# Altium PCB COREV1.1_pcb5_0.PcbDoc (part 7 of 14)
Units mil, origin at the board's own origin, x right, y up, seen from the top; angles counter-clockwise.
Board outline 2860 x 2420 mil, 6 copper layers (Top Layer, GND, SIGNAL_1, SIGNAL_2, POWER, Bottom Layer); 110 components, 241 nets, 882 pads, 697 vias.
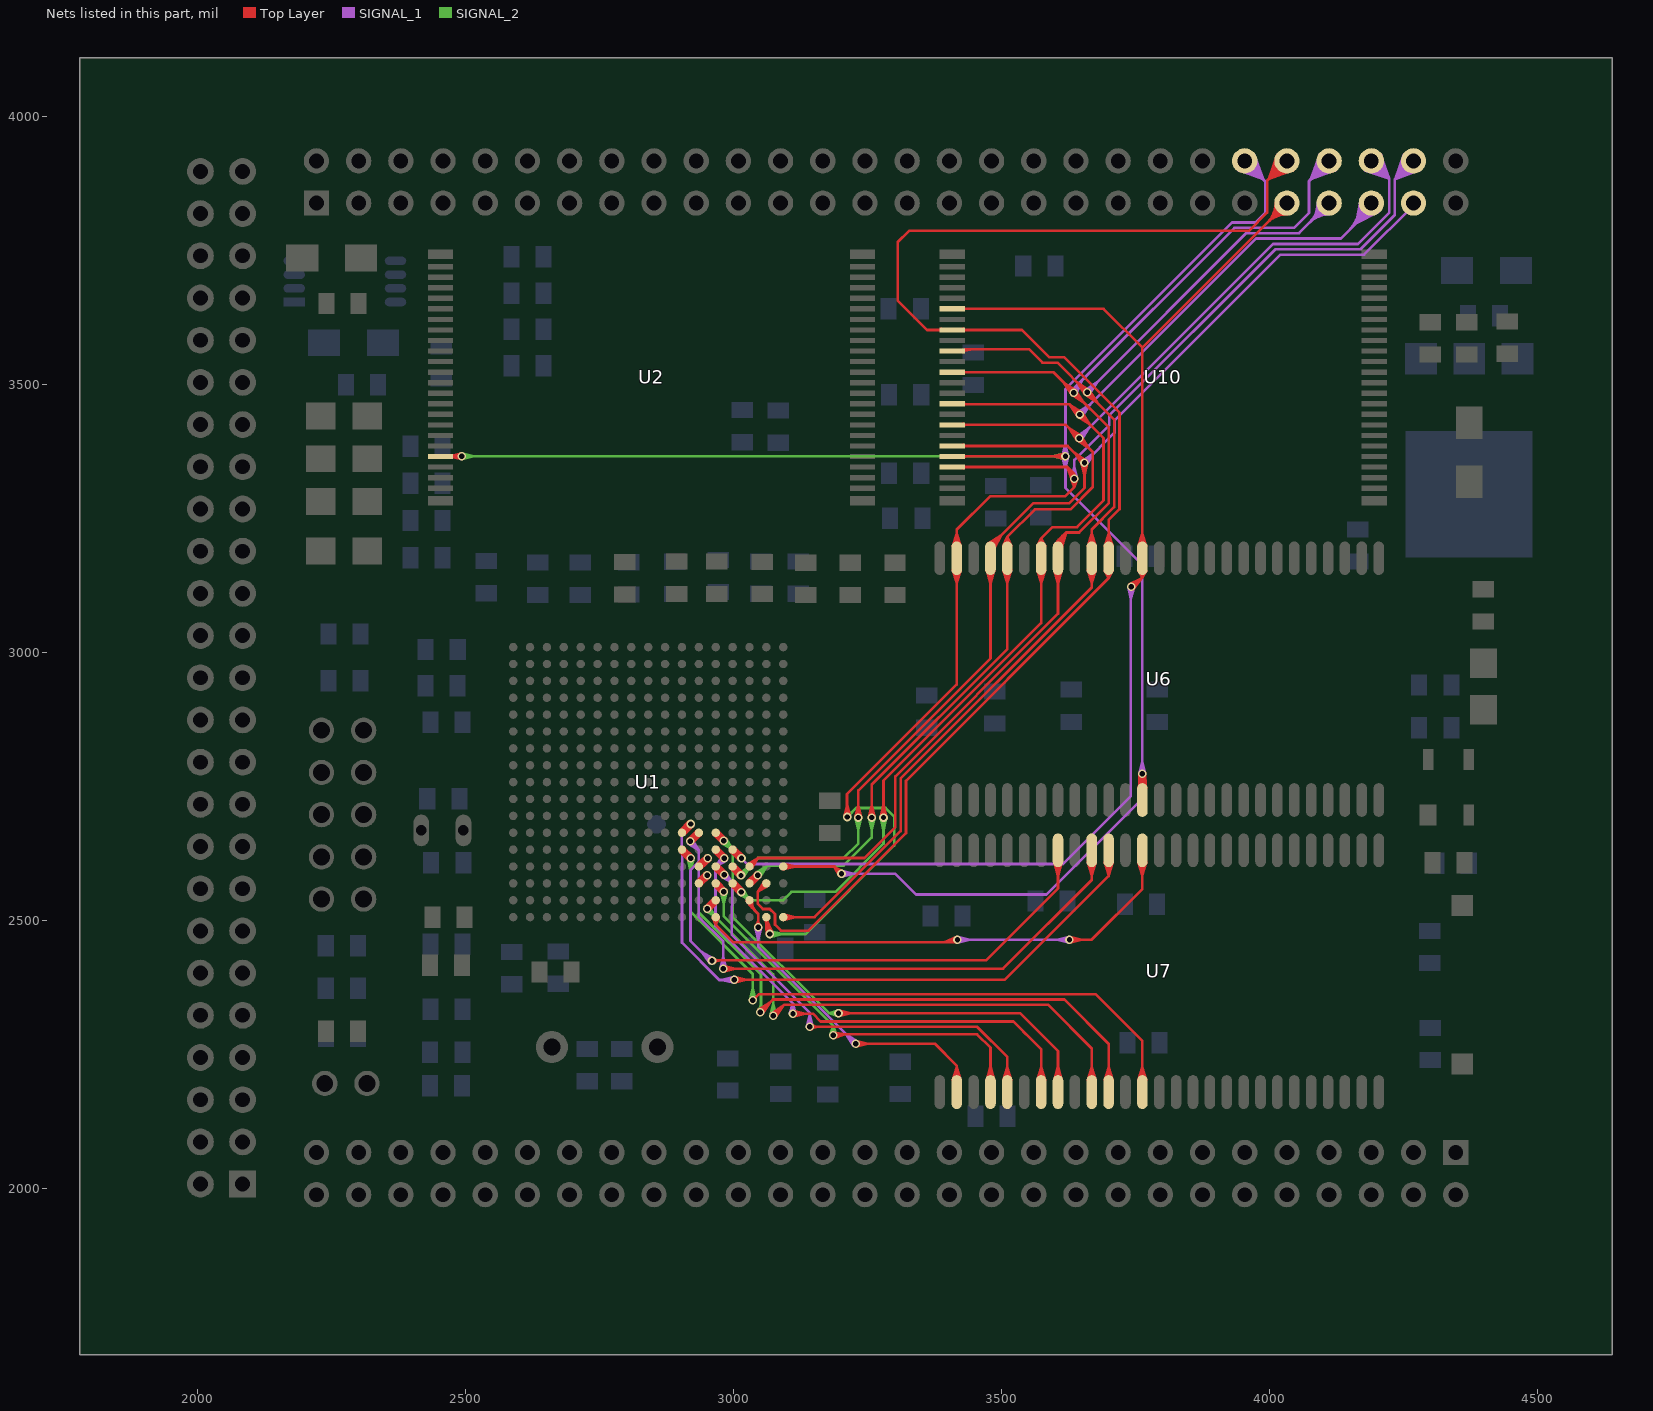
[diagram p11: the nets of this part, all layers, seen from the top]

## Via types
v1: diameter 16, hole 10, Top Layer to Bottom Layer, tented both sides, 638 vias
v2: diameter 30, hole 18, Top Layer to Bottom Layer, tented both sides, 56 vias
v3: diameter 16, hole 10, Top Layer to Bottom Layer, 2 vias
v4: diameter 30, hole 16, Top Layer to Bottom Layer, tented both sides, 1 vias

## Nets (pads, with @x,y where several pads share a name; then routed paths per layer and width w, separated by ;. In a path a pad name is that pad's centre, name@x,y a point inside that pad or via, vN(x,y) a via of type N, cw(c..) or ccw(c..) an arc to the next point about the centre after c; other vN are vias at no path point) (continued)
LDATA7: pad.PC46 U1.A14 U2.44 U6.13 U10.44 | length 5521.4
  Top Layer w5: U2.44@2453.42,3365.73 2453.7,3366 v1(2493,3366) U2.44@2472.12,3365.73 ; U2.44@2473.84,3364.02 cw(c2478.63,3359.23) 2478.63,3366 ; U2.44@2473.84,3367.44 ccw(c2477.31,3370.92) 2477.31,3366 ; v1@2489.11,3362.11 ccw(c2479.72,3352.72) 2479.72,3366 ccw(c2479.72,3379.28) v1@2489.11,3369.89 ; v1@2492.05,3366 U2.44@2472.12,3365.73 ; v1@2492.2,3371.44 U2.44@2472.12,3365.73 ; v1@2492.34,3371.46 2470,3366 2492.34,3360.54 U2.44@2472.12,3365.73 ; U1.A14@3092.85,2600.65 3188,2600.65 ; U1.A14@3093.49,2595.32 3115.73,2600.65 U1.A14@3093.49,2605.99 ; U1.A14@3096.65,2596.85 cw(c3105.83,2587.68) 3105.83,2600.65 cw(c3105.83,2613.63) U1.A14@3096.65,2604.45 ; v1@3196.15,2587 ccw(c3182.88,2587) 3192.26,2596.39 ccw(c3201.65,2605.78) v1@3201.65,2592.5 ; v1@3197.25,2583.7 3188,2600.65 ; v1@3204.95,2591.4 3188,2600.65 ; U10.44@3408.42,3365.73 3408.7,3366 v1(3619.5,3366) 3596.5,3366 ; U10.44@3427.12,3365.73 3447.05,3366 ; U10.44@3428.84,3364.02 cw(c3433.63,3359.23) 3433.63,3366 ; U10.44@3428.84,3367.44 ccw(c3432.31,3370.92) 3432.31,3366 ; v1@3615.61,3362.11 ccw(c3606.22,3352.72) 3606.22,3366 ccw(c3606.22,3379.28) v1@3615.61,3369.89 ; v1@3618.84,3360.54 3596.5,3366 ; v1@3618.84,3371.46 3596.5,3366 ; U6.13@3755.82,2747.47 v1@3763.08,2771.23 ; v1@3757.64,2774.79 U6.13@3757.04,2751.46 ; U6.13@3757.89,2751.58 ccw(c3745.35,2764.11) 3763.08,2764.11 ccw(c3780.81,2764.11) U6.13@3768.27,2751.58 ; v1@3757.97,2771.96 U6.13@3769.12,2751.46 ; v1@3759.19,2770.11 cw(c3749.8,2760.72) 3763.08,2760.72 cw(c3776.36,2760.72) v1@3766.97,2770.11 ; U6.13@3763.08,2724.73 v1(3763.08,2774) ; U6.13@3763.08,2746.39 v1@3763.08,2771.23 ; v1@3768.19,2771.96 U6.13@3757.04,2751.46 ; v1@3768.52,2774.79 U6.13@3769.12,2751.46 ; U6.13@3770.34,2747.47 v1@3763.08,2771.23 ; 3188,2600.65 v1(3201.65,2587) 3188,2600.65 ; U6.13@3757.04,2751.46 v1(3763.08,2774) ; U6.13@3763.08,2751 3768.54,2773.34 U6.13@3763.08,2751 ; U6.13@3763.08,2751 3757.62,2773.34 U6.13@3763.08,2751 ; U6.13@3763.08,2751 v1(3763.08,2774) ; v1(3763.08,2774) U6.13@3769.12,2751.46
  SIGNAL_1 w5: v1(3201.65,2587) 3302.08,2587 3340.58,2548.5 3584.14,2548.5 3763.08,2727.44 v1@3763.08,2771.35 ; v1@3202.31,2581.54 3224.65,2587 v1@3202.31,2592.46 ; v1@3205.54,2583.11 cw(c3214.93,2573.72) 3214.93,2587 cw(c3214.93,2600.28) v1@3205.54,2590.89 ; v1@3614.04,3365.34 3619.5,3343 ; v1@3614.04,3366.66 3619.5,3389 v1@3624.96,3366.66 ; v1@3615.61,3362.11 cw(c3606.22,3352.72) 3619.5,3352.72 cw(c3632.78,3352.72) v1@3623.39,3362.11 ; v1@3615.61,3369.89 ccw(c3606.22,3379.28) 3619.5,3379.28 ccw(c3632.78,3379.28) v1@3623.39,3369.89 ; v1@3624.96,3365.34 3619.5,3343 ; v1@3757.62,2773.34 3763.08,2751 ; v1@3757.62,2774.66 3763.08,2797 v1@3768.54,2774.66 ; v1@3759.19,2770.11 cw(c3749.8,2760.72) 3763.08,2760.72 cw(c3776.36,2760.72) v1@3766.97,2770.11 ; v1@3759.19,2777.89 ccw(c3749.8,2787.28) 3763.08,2787.28 ccw(c3776.36,2787.28) v1@3766.97,2777.89 ; v1@3768.54,2773.34 3763.08,2751 ; pad.PC46@3942.76,3899.61 3988.31,3883.22 ; pad.PC46@3944.74,3904.31 3988.31,3883.22 ; pad.PC46@3947.17,3908.73 3988.31,3883.22 ; pad.PC46@3950.03,3912.85 3988.31,3883.22 ; pad.PC46@3954.08,3896.33 cw(c3954.08,3845.33) 3990.14,3881.39 cw(c4026.19,3917.45) pad.PC46@3975.2,3917.45 ; pad.PC46@3954.08,3901.33 cw(c3954.08,3862.4) 3981.6,3889.93 cw(c4009.12,3917.45) pad.PC46@3970.2,3917.45 ; pad.PC46@3954.08,3906.33 cw(c3954.08,3879.48) 3973.06,3898.46 cw(c3992.05,3917.45) pad.PC46@3965.2,3917.45 ; pad.PC46@3954.08,3917.45 3993,3878.53 3993,3821 3974.5,3802.5 3930.43,3802.5 3619.5,3491.57 v1(3619.5,3366) ; pad.PC46@3958.67,3921.49 3988.31,3883.22 ; pad.PC46@3962.79,3924.36 3988.31,3883.22 ; pad.PC46@3967.22,3926.79 3988.31,3883.22 ; pad.PC46@3971.91,3928.77 3988.31,3883.22 ; 3619.5,3343 v1(3619.5,3366) ; v1(3619.5,3366) 3619.5,3307 3763.08,3163.42 v1(3763.08,2774) 3763.08,2751
  SIGNAL_2 w5: v1(2493,3366) v1(3619.5,3366) ; v1@2493.66,3360.54 2516,3366 v1@2493.66,3371.46 ; v1@2496.89,3362.11 cw(c2506.28,3352.72) 2506.28,3366 cw(c2506.28,3379.28) v1@2496.89,3369.89 ; v1@3615.61,3362.11 ccw(c3606.22,3352.72) 3606.22,3366 ccw(c3606.22,3379.28) v1@3615.61,3369.89 ; v1@3618.84,3360.54 3596.5,3366 v1@3618.84,3371.46
LDATA8: pad.PC47 U1.D13 U6.42 U10.30 | length 3380.4
  Top Layer w5: U1.D13@2998.37,2626.78 cw(c2998.37,2612.63) 3008.37,2622.63 ; U1.D13@3003.74,2632.15 ccw(c3015.55,2632.15) 3007.2,2623.8 ; v1@3009.5,2616 ccw(c2996.22,2616) 3005.61,2625.39 ccw(c3015,2634.78) v1@3015,2621.5 ; v1@3010.05,2613.61 U1.D13@3002.53,2635.55 ; v1@3010.67,2612.61 U1.D13@2998.85,2632.15 ; v1@3010.73,2612.54 U1.D13@2998.37,2632.15 ; v1@3011.64,2611.65 U1.D13@2995.09,2627.89 ; v1@3017.24,2621.02 U1.D13@2995.09,2627.89 ; v1@3018.34,2620.37 U1.D13@2998.37,2632.15 ; v1@3018.39,2620.33 U1.D13@2998.85,2632.15 ; v1@3019.25,2619.49 U1.D13@3002.53,2635.55 ; U10.30@3408.42,3641.32 3633,3641.32 ; U10.30@3427.12,3641.32 3447.05,3641.32 ; U10.30@3428.84,3639.61 cw(c3432.97,3635.47) 3432.97,3641.32 cw(c3432.97,3647.16) U10.30@3428.84,3643.03 ; 3643.1,3641.32 3633,3641.32 ; v1@3738.99,3127.1 3761.83,3138.75 ; v1@3742,3128 ccw(c3742,3149.92) 3757.5,3134.42 ; v1@3745.92,3118.64 3761.83,3138.75 ; U6.42@3755.81,3198.63 3763,3222.41 ; U6.42@3755.99,3152.37 3763.08,3140 ; U6.42@3757.89,3202.76 ccw(c3745.55,3215.1) 3763,3215.1 ; U6.42@3758.82,3148.28 cw(c3752.9,3140) 3763.08,3140 ; 3763,3215.49 ccw(c3781,3215.49) U6.42@3768.27,3202.76 ; U6.42@3763.08,3154.26 3763.08,3140 ; U6.42@3763.08,3197.57 3763,3222.41 ; U6.42@3763.5,3179.5 U6.42@3763.08,3179.92 ; U6.42@3767.34,3148.28 ccw(c3773.26,3140) 3763.08,3140 ; U6.42@3770.18,3152.37 3763.08,3140 ; U6.42@3770.34,3198.68 3763,3222.41 ; pad.PC47@4011.7,3838.71 cw(c3960.7,3838.71) 3996.76,3802.65 cw(c4032.82,3766.59) pad.PC47@4032.82,3817.59 ; pad.PC47@4016.7,3838.71 cw(c3977.77,3838.71) 4005.3,3811.19 cw(c4032.82,3783.66) pad.PC47@4032.82,3822.59 ; pad.PC47@4021.7,3838.71 cw(c3994.85,3838.71) 4013.83,3819.72 cw(c4032.82,3800.74) pad.PC47@4032.82,3827.59 ; pad.PC47@4032.82,3838.71 3763,3568.89 ; U1.D13@2995.09,2627.89 v1(3015,2616) ; U1.D13@2995.09,2627.89 v1(3015,2616) ; U1.D13@2998.37,2632.15 U1.D13@2998.85,2632.15 ; U1.D13@2998.37,2632.15 v1(3015,2616) ; U1.D13@2998.37,2632.15 v1(3015,2616) ; U1.D13@2998.85,2632.15 v1(3015,2616) ; U1.D13@2998.85,2632.15 v1(3015,2616) ; U1.D13@3002.53,2635.55 v1(3015,2616) ; U1.D13@3002.53,2635.55 v1(3015,2616) ; 3633,3641.32 3690.57,3641.32 3763,3568.89 ; 3761.83,3138.75 v1(3742,3122.5) 3745.58,3122.5 3763.08,3140 ; 3763,3568.89 3763,3180 U6.42@3763.08,3179.92 ; 3763.08,3140 U6.42@3763.08,3175.91 U6.42@3763.08,3179.92
  SIGNAL_1 w5: v1(3015,2616) 3025.5,2605.5 3615,2605.5 3741.5,2732 3741.5,3122 v1(3742,3122.5) 3741.5,3099.48 ; v1@3736.53,3121.96 3741.5,3099.48 ; v1@3738.11,3118.61 cw(c3729.93,3110.43) 3741.5,3110.43 ; 3741.5,3108.01 cw(c3756.49,3108.01) v1@3745.89,3118.61 ; v1@3747.45,3121.72 3741.5,3099.48
LDATA9: pad.PC48 U1.B15 U6.44 U10.32 | length 3713.7
  Top Layer w5: U1.B15@3055.98,2569.16 cw(c3043.01,2569.16) 3052.18,2559.98 cw(c3061.36,2550.81) U1.B15@3061.36,2563.78 ; U1.B15@3057.14,2572.48 3045.24,2553.04 ; U1.B15@3061.81,2569.16 U1.B15@3061.36,2569.16 ; U1.B15@3064.68,2564.94 3045.24,2553.04 ; 3105.77,2481 3095,2481 ; 3369.8,3601.95 U10.32@3389.72,3601.95 ; U10.32@3388.01,3600.24 ccw(c3383.88,3596.1) 3383.88,3601.95 ccw(c3383.88,3607.79) U10.32@3388.01,3603.66 ; U10.32@3427.12,3601.95 3447.05,3601.95 ; U10.32@3428.84,3600.24 cw(c3432.97,3596.1) 3432.97,3601.95 cw(c3432.97,3607.79) U10.32@3428.84,3603.66 ; U6.44@3692.83,3198.65 3700.09,3222.41 ; U6.44@3692.95,3152.54 3700.09,3138.63 ; U6.44@3694.9,3202.76 ccw(c3682.36,3215.29) 3700.09,3215.29 ccw(c3717.81,3215.29) U6.44@3705.28,3202.76 ; U6.44@3695.4,3148.61 cw(c3687.13,3138.63) 3700.09,3138.63 ; U6.44@3700.09,3154.26 3700.09,3138.63 ; U6.44@3700.09,3197.57 3700.09,3222.41 ; U6.44@3704.77,3148.61 ccw(c3713.05,3138.63) 3700.09,3138.63 ; U6.44@3707.22,3152.54 3700.09,3138.63 ; U6.44@3707.35,3198.65 3700.09,3222.41 ; pad.PC48@4011.7,3917.45 cw(c3960.7,3917.45) 3996.76,3881.39 cw(c4032.82,3845.33) pad.PC48@4032.82,3896.33 ; pad.PC48@4014.98,3928.77 3998.59,3883.22 ; pad.PC48@4016.7,3917.45 cw(c3977.77,3917.45) 4005.3,3889.93 cw(c4032.82,3862.4) pad.PC48@4032.82,3901.33 ; pad.PC48@4019.68,3926.79 3998.59,3883.22 ; pad.PC48@4021.7,3917.45 cw(c3994.85,3917.45) 4013.83,3898.46 cw(c4032.82,3879.48) pad.PC48@4032.82,3906.33 ; pad.PC48@4024.1,3924.36 3998.59,3883.22 ; pad.PC48@4028.22,3921.49 3998.59,3883.22 ; pad.PC48@4032.82,3917.45 3996,3880.63 3996,3821 3962,3787 3327.85,3787 3306.5,3765.65 3306.5,3656.5 3361.05,3601.95 U10.32@3408.42,3601.95 3538.55,3601.95 3589.68,3550.82 3617.52,3550.82 3720.5,3447.85 3720.5,3267.5 3700.09,3247.09 U6.44@3700.09,3175.91 3700.09,3138.63 ; pad.PC48@4036.86,3912.85 3998.59,3883.22 ; pad.PC48@4039.73,3908.73 3998.59,3883.22 ; pad.PC48@4042.16,3904.31 3998.59,3883.22 ; pad.PC48@4044.14,3899.61 3998.59,3883.22 ; 3045.24,2553.04 U1.B15@3061.36,2569.16 ; 3045.24,2553.04 3045.24,2531.24 3054.93,2521.54 3067.73,2521.54 3077.48,2511.78 3077.48,2492.19 3088.67,2481 3095,2481 ; 3045.24,2553.04 U1.B15@3061.36,2569.16 ; 3095,2481 3140.2,2481 3322,2662.8 3322,2760.54 3700.09,3138.63
LDATA10: pad.PC49 U1.A17 U6.45 U10.34 | length 2934.2
  Top Layer w5: U1.A17@3092.85,2506.16 3151.23,2506.16 3312,2666.94 3312,2764.69 3668.59,3121.28 U6.45@3668.59,3175.91 3668.59,3229.73 3710.5,3271.64 3710.5,3435 v1(3659.96,3485.54) ; U1.A17@3093.49,2500.83 3115.73,2506.16 U1.A17@3093.49,2511.5 ; U1.A17@3096.65,2502.36 cw(c3105.83,2493.19) 3105.83,2506.16 cw(c3105.83,2519.14) U1.A17@3096.65,2509.96 ; U10.34@3408.42,3562.58 3429.58,3562.58 3433,3566 ; U10.34@3427.94,3564.86 ccw(c3429.57,3569.43) 3433,3566 ; U10.34@3428.84,3560.87 cw(c3441.23,3548.47) 3441.23,3566 ; U10.34@3429.55,3562.56 cw(c3433,3562.55) 3433,3566 ; 3447.22,3566 U10.34@3427.12,3562.58 ; v1@3654.46,3485.54 ccw(c3641.18,3485.54) 3650.57,3494.93 ccw(c3659.96,3504.32) v1@3659.96,3491.04 ; v1@3655.69,3482.08 3641.36,3504.14 ; v1@3656.5,3481.26 3678.57,3466.93 v1@3664.24,3489 ; v1@3659.96,3480.04 cw(c3659.96,3466.76) 3669.35,3476.15 cw(c3678.74,3485.54) v1@3665.46,3485.54 ; U6.45@3661.33,3153.18 3668.59,3129.42 ; U6.45@3661.33,3198.65 3668.59,3222.41 ; U6.45@3663.4,3149.07 cw(c3650.86,3136.53) 3668.59,3136.53 cw(c3686.32,3136.53) U6.45@3673.78,3149.07 ; U6.45@3663.4,3202.76 ccw(c3650.86,3215.29) 3668.59,3215.29 ccw(c3686.32,3215.29) U6.45@3673.78,3202.76 ; v1@3663.42,3489.81 3641.36,3504.14 ; U6.45@3668.59,3154.26 3668.59,3129.42 ; U6.45@3668.59,3197.57 3668.59,3222.41 ; U6.45@3675.85,3153.18 3668.59,3129.42 ; U6.45@3675.85,3198.65 3668.59,3222.41 ; U10.34@3427.12,3562.58 3433,3566 ; U10.34@3427.12,3562.58 3433,3566 ; 3433,3566 3551.26,3566 3576.44,3540.82 3604.68,3540.82 v1(3659.96,3485.54) ; 3641.36,3504.14 v1(3659.96,3485.54)
  SIGNAL_1 w5: v1@3656.5,3489.81 3678.57,3504.14 v1@3664.24,3482.08 ; v1(3659.96,3485.54) 3956.93,3782.5 4055.35,3782.5 pad.PC49@4111.56,3838.71 ; v1@3659.96,3491.04 ccw(c3659.96,3504.32) 3669.35,3494.93 ccw(c3678.74,3485.54) v1@3665.46,3485.54 ; pad.PC49@4090.44,3838.71 cw(c4039.45,3838.71) 4075.5,3802.65 cw(c4111.56,3766.59) pad.PC49@4111.56,3817.59 ; pad.PC49@4095.44,3838.71 cw(c4056.52,3838.71) 4084.04,3811.19 cw(c4111.56,3783.66) pad.PC49@4111.56,3822.59 ; pad.PC49@4100.44,3838.71 cw(c4073.59,3838.71) 4092.57,3819.72 cw(c4111.56,3800.74) pad.PC49@4111.56,3827.59
LDATA11: pad.PC50 U1.C14 U6.47 U10.36 | length 3562
  Top Layer w5: U1.C14@3026.55,2604.88 3045.71,2616.5 ; U1.C14@3029.86,2600.65 3045.71,2616.5 ; U1.C14@3029.86,2606.03 ccw(c3029.86,2619) 3039.04,2609.83 ccw(c3048.21,2600.65) U1.C14@3035.24,2600.65 ; U1.C14@3034.09,2597.34 3045.71,2616.5 ; U10.36@3408.42,3523.21 3596.79,3523.21 v1(3635,3485) ; U10.36@3427.12,3523.21 3447.05,3523.21 ; U10.36@3428.84,3521.5 cw(c3432.97,3517.36) 3432.97,3523.21 cw(c3432.97,3529.05) U10.36@3428.84,3524.92 ; U6.47@3598.34,3153.18 3605.6,3129.42 ; U6.47@3599.69,3201.92 3620.5,3224 ; U6.47@3600.41,3149.07 cw(c3587.87,3136.53) 3605.6,3136.53 cw(c3623.32,3136.53) U6.47@3610.79,3149.07 ; U6.47@3602.49,3204.22 ccw(c3600.22,3209.1) 3605.6,3209.1 ; U6.47@3602.99,3197.07 cw(c3617.9,3199.93) 3607.16,3210.66 ; U6.47@3605.6,3154.26 3605.6,3129.42 ; U6.47@3607.9,3198.01 cw(c3629.09,3202.08) 3613.83,3217.33 ; U6.47@3608.7,3204.22 cw(c3610.98,3209.1) 3605.6,3209.1 ; U6.47@3612.38,3194.76 3620.5,3224 ; U6.47@3612.81,3198.95 cw(c3640.27,3204.22) 3620.5,3224 ; U6.47@3612.86,3153.18 3605.6,3129.42 ; v1@3629.5,3485 ccw(c3616.22,3485) 3625.61,3494.39 ccw(c3635,3503.78) v1@3635,3490.5 ; v1@3630.73,3481.54 3616.39,3503.61 ; v1@3631.54,3480.73 3653.61,3466.39 v1@3639.27,3488.46 ; v1@3635,3479.5 cw(c3635,3466.22) 3644.39,3475.61 cw(c3653.78,3485) v1@3640.5,3485 ; v1@3638.46,3489.27 3616.39,3503.61 ; 3045.71,2616.5 3244.42,2616.5 3302,2674.08 3302,2768.83 3605.6,3072.43 U6.47@3605.6,3175.91 3605.6,3209.1 ; U6.47@3605.6,3197.57 3620.5,3224 ; U6.47@3605.6,3197.57 3605.6,3209.1 ; U6.47@3605.6,3197.57 3605.6,3209.1 ; 3605.6,3209.1 3620.5,3224 ; 3605.6,3209.1 3598.64,3199.91 3605.6,3209.1 ; 3605.6,3209.1 3612.56,3199.91 3605.6,3209.1 ; 3616.39,3503.61 v1(3635,3485) ; 3620.5,3224 3645.06,3224 3700.5,3279.44 3700.5,3419.5 v1(3635,3485)
  SIGNAL_1 w5: v1@3630.74,3488.48 3651.12,3509.05 ; v1@3635.5,3485 cw(c3655.86,3485) 3641.46,3499.39 ; v1@3639.84,3482.39 3651.12,3509.05 ; v1@3640.5,3485 cw(c3672.93,3485) 3650,3507.93 ; pad.PC50@4090.44,3917.45 cw(c4039.45,3917.45) 4075.5,3881.39 cw(c4111.56,3845.33) pad.PC50@4111.56,3896.33 ; pad.PC50@4093.73,3928.77 4077.33,3883.22 ; pad.PC50@4095.44,3917.45 cw(c4056.52,3917.45) 4084.04,3889.93 cw(c4111.56,3862.4) pad.PC50@4111.56,3901.33 ; pad.PC50@4098.42,3926.79 4077.33,3883.22 ; pad.PC50@4100.44,3917.45 cw(c4073.59,3917.45) 4092.57,3898.46 cw(c4111.56,3879.48) pad.PC50@4111.56,3906.33 ; pad.PC50@4102.84,3924.36 4077.33,3883.22 ; pad.PC50@4106.97,3921.49 4077.33,3883.22 ; pad.PC50@4111.56,3917.45 4074.07,3879.96 4074.07,3820.57 4046,3792.5 3934.57,3792.5 3635,3492.93 v1(3635,3485) 3651.12,3509.05 ; pad.PC50@4115.61,3912.85 4077.33,3883.22 ; pad.PC50@4118.47,3908.73 4077.33,3883.22 ; pad.PC50@4120.9,3904.31 4077.33,3883.22 ; pad.PC50@4122.88,3899.61 4077.33,3883.22
LDATA12: pad.PC51 U1.D15 U6.48 U10.39 | length 3943.1
  Top Layer w5: U1.D15@2998.37,2563.78 cw(c2998.37,2550.81) 3007.54,2559.98 cw(c3016.71,2569.16) U1.D15@3003.74,2569.16 ; v1@3009.02,2553 ccw(c2995.75,2553) 3005.13,2562.39 ccw(c3014.52,2571.78) v1@3014.52,2558.5 ; v1@3009.52,2550.71 U1.D15@3002.59,2572.48 ; v1@3010.2,2549.61 U1.D15@2998.37,2569.16 ; v1@3011.11,2548.69 U1.D15@2995.04,2564.94 ; v1@3016.81,2558 U1.D15@2995.04,2564.94 ; v1@3017.92,2557.33 U1.D15@2998.37,2569.16 ; v1@3018.83,2556.42 U1.D15@3002.59,2572.48 ; v1@3274.54,2692.66 3280,2715 v1@3285.46,2692.66 ; v1@3276.11,2695.89 ccw(c3266.72,2705.28) 3280,2705.28 ccw(c3293.28,2705.28) v1@3283.89,2695.89 ; v1(3280,2692) 3280,2760.97 3574.1,3055.07 U6.48@3574.1,3175.91 3574.1,3213.1 ; U10.39@3408.42,3464.15 3409.08,3463.5 3627,3463.5 v1(3646.43,3444.07) ; U10.39@3427.12,3464.15 3447.05,3463.5 ; U10.39@3428.84,3465.87 ccw(c3434.55,3471.58) 3434.55,3463.5 ; U6.48@3566.84,3153.18 3574.1,3129.42 ; U6.48@3566.97,3199.3 3574.1,3213.1 ; U6.48@3568.91,3149.07 cw(c3556.38,3136.53) 3574.1,3136.53 cw(c3591.83,3136.53) U6.48@3579.29,3149.07 ; U6.48@3569.44,3203.24 ccw(c3561.34,3213.1) 3574.1,3213.1 ; U6.48@3574.1,3154.26 3574.1,3129.42 ; U6.48@3574.1,3197.57 3574.1,3213.1 ; U6.48@3578.76,3203.24 cw(c3586.86,3213.1) 3574.1,3213.1 ; U6.48@3581.24,3199.3 3574.1,3213.1 ; U6.48@3581.36,3153.18 3574.1,3129.42 ; v1@3640.93,3444.07 ccw(c3627.65,3444.07) 3637.04,3453.46 ccw(c3646.43,3462.85) v1@3646.43,3449.57 ; v1@3642.15,3440.61 3627.82,3462.68 ; v1@3642.96,3439.8 3665.03,3425.47 v1@3650.7,3447.54 ; v1@3646.43,3438.57 cw(c3646.43,3425.3) 3655.82,3434.68 cw(c3665.2,3444.07) v1@3651.93,3444.07 ; v1@3649.89,3448.35 3627.82,3462.68 ; U1.D15@2995.04,2564.94 v1(3014.52,2553) ; U1.D15@2995.04,2564.94 v1(3014.52,2553) ; U1.D15@2998.37,2569.16 v1(3014.52,2553) ; U1.D15@2998.37,2569.16 v1(3014.52,2553) ; U1.D15@3002.59,2572.48 v1(3014.52,2553) ; U1.D15@3002.59,2572.48 v1(3014.52,2553) ; 3574.1,3213.1 3595,3234 3640.92,3234 3690.5,3283.58 3690.5,3400 v1(3646.43,3444.07) ; 3627.82,3462.68 v1(3646.43,3444.07)
  SIGNAL_1 w5: v1@3643.03,3448.4 3665.31,3462.41 ; v1@3646.43,3449.57 ccw(c3646.43,3464.19) 3656.76,3453.85 ; v1@3650.65,3440.55 3665.31,3462.41 ; v1@3651.93,3444.07 cw(c3663.87,3444.07) 3655.42,3452.52 ; 4147.59,3786.59 ccw(c4095.47,3838.71) pad.PC51@4169.18,3838.71 ; 4156.13,3795.13 ccw(c4112.54,3838.71) pad.PC51@4174.18,3838.71 ; 4164.66,3803.66 ccw(c4129.61,3838.71) pad.PC51@4179.18,3838.71 ; 4170.3,3809.3 cw(c4190.3,3789.31) pad.PC51@4190.3,3817.59 ; pad.PC51@4170.98,3847.24 4162.19,3801.19 ; 4173.2,3812.2 ccw(c4146.69,3838.71) pad.PC51@4184.18,3838.71 ; pad.PC51@4175.93,3846.01 4162.19,3801.19 ; 4178.84,3817.84 cw(c4190.3,3806.38) pad.PC51@4190.3,3822.59 ; pad.PC51@4180.67,3844.27 4162.19,3801.19 ; pad.PC51@4185.17,3842.05 4162.19,3801.19 ; pad.PC51@4194.95,3834.73 4162.19,3801.19 ; pad.PC51@4198.35,3831.03 4162.19,3801.19 ; pad.PC51@4201.35,3826.97 4162.19,3801.19 ; pad.PC51@4203.92,3822.56 4162.19,3801.19 ; 3665.31,3462.41 v1(3646.43,3444.07) 3646.98,3444.07 3975.41,3772.5 4133.5,3772.5 4190.3,3829.3 pad.PC51@4190.3,3838.71 4162.19,3801.19
  SIGNAL_2 w5: v1@3011.15,2548.65 3030.02,2537.5 ; v1@3014.52,2547.5 cw(c3014.52,2534.22) 3023.91,2543.61 cw(c3033.3,2553) v1@3020.02,2553 ; v1(3014.52,2553) 3030.02,2537.5 ; v1@3018.87,2556.37 3030.02,2537.5 ; v1@3274.54,2691.34 3280,2669 ; v1@3276.11,2688.11 cw(c3266.72,2678.72) 3280,2678.72 cw(c3293.28,2678.72) v1@3283.89,2688.11 ; 3280,2674 3280,2661 ; v1@3285.46,2691.34 3280,2669 ; 3030.02,2537.5 3092,2537.5 3108,2553.5 3190.07,2553.5 3280,2643.43 3280,2661 ; 3280,2661 v1(3280,2692) 3280,2669
LDATA13: pad.PC52 U1.C15 U6.50 U10.41 | length 3850.5
  Top Layer w5: U1.C15@3029.86,2574.53 ccw(c3029.86,2587.51) 3039.04,2578.33 ccw(c3048.21,2569.16) U1.C15@3035.24,2569.16 ; v1@3039.74,2584.53 cw(c3026.46,2584.53) 3035.85,2575.14 cw(c3045.24,2565.75) v1@3045.24,2579.03 ; v1@3040.19,2586.73 U1.C15@3034.1,2565.86 ; v1@3040.89,2587.9 U1.C15@3029.86,2569.16 ; v1@3041.84,2588.86 U1.C15@3026.56,2573.4 ; v1@3047.43,2579.49 U1.C15@3026.56,2573.4 ; v1@3048.6,2580.18 U1.C15@3029.86,2569.16 ; v1@3049.57,2581.14 U1.C15@3034.1,2565.86 ; v1@3252.54,2692.66 3258,2715 v1@3263.46,2692.66 ; v1@3254.11,2695.89 ccw(c3244.72,2705.28) 3258,2705.28 ccw(c3271.28,2705.28) v1@3261.89,2695.89 ; v1(3258,2692) 3258,2753.24 3511.11,3006.35 U6.50@3511.11,3175.91 3511.11,3216.11 ; U10.41@3408.42,3424.78 3620.22,3424.78 v1(3645,3400) ; U10.41@3427.12,3424.78 3447.05,3424.78 ; U10.41@3428.84,3423.07 cw(c3432.97,3418.94) 3432.97,3424.78 cw(c3432.97,3430.63) U10.41@3428.84,3426.5 ; U6.50@3503.85,3153.18 3511.11,3129.42 ; U6.50@3503.91,3199.02 3511.11,3216.11 ; U6.50@3505.92,3149.07 cw(c3493.38,3136.53) 3511.11,3136.53 cw(c3528.84,3136.53) U6.50@3516.3,3149.07 ; U6.50@3505.92,3202.76 ccw(c3493.38,3215.29) 3511.11,3215.29 ccw(c3528.84,3215.29) U6.50@3516.3,3202.76 ; U6.50@3511.11,3154.26 3511.11,3129.42 ; U6.50@3511.11,3197.57 3511.11,3216.11 ; U6.50@3518.31,3199.02 3511.11,3216.11 ; U6.50@3518.37,3153.18 3511.11,3129.42 ; v1@3639.5,3400 ccw(c3626.22,3400) 3635.61,3409.39 ccw(c3645,3418.78) v1@3645,3405.5 ; v1@3640.73,3396.54 3626.39,3418.61 ; v1@3641.54,3395.73 3663.61,3381.39 v1@3649.27,3403.46 ; v1@3645,3394.5 cw(c3645,3381.22) 3654.39,3390.61 cw(c3663.78,3400) v1@3650.5,3400 ; v1@3648.46,3404.27 3626.39,3418.61 ; U1.C15@3026.56,2573.4 v1(3045.24,2584.53) ; U1.C15@3026.56,2573.4 v1(3045.24,2584.53) ; U1.C15@3029.86,2569.16 v1(3045.24,2584.53) ; U1.C15@3029.86,2569.16 v1(3045.24,2584.53) ; U1.C15@3034.1,2565.86 v1(3045.24,2584.53) ; U1.C15@3034.1,2565.86 v1(3045.24,2584.53) ; 3511.11,3216.11 3562.3,3267.3 3629.12,3267.3 3670.5,3308.68 3670.5,3374.5 v1(3645,3400) ; 3626.39,3418.61 v1(3645,3400)
  SIGNAL_1 w5: v1@3641.47,3404.21 3663.28,3418.93 ; v1@3645,3405.5 ccw(c3645,3417.23) 3653.29,3408.94 ; v1@3649.33,3396.61 3663.28,3418.93 ; v1@3650.5,3400 cw(c3665.33,3400) 3654.84,3410.49 ; pad.PC52@4179.11,3899.54 4223.5,3884.25 ; pad.PC52@4181.03,3904.26 4223.5,3884.25 ; pad.PC52@4183.42,3908.71 4223.5,3884.25 ; pad.PC52@4186.26,3912.85 4223.5,3884.25 ; pad.PC52@4190.3,3917.45 4223.5,3884.25 ; pad.PC52@4190.97,3906.35 cw(c4192.29,3884.47) 4207.78,3899.97 cw(c4223.28,3915.46) pad.PC52@4201.4,3916.78 ; pad.PC52@4191.27,3901.36 cw(c4193.18,3869.65) 4215.64,3892.11 cw(c4238.1,3914.57) pad.PC52@4206.39,3916.48 ; pad.PC52@4191.57,3896.36 cw(c4194.07,3854.82) 4223.5,3884.25 ; pad.PC52@4194.9,3921.49 4223.5,3884.25 ; pad.PC52@4199.04,3924.33 4223.5,3884.25 ; pad.PC52@4203.49,3926.72 4223.5,3884.25 ; pad.PC52@4208.21,3928.64 4223.5,3884.25 ; pad.PC52@4211.38,3916.18 ccw(c4252.93,3913.68) 4223.5,3884.25 ; 3663.28,3418.93 v1(3645,3400) 3645,3400.64 4006.86,3762.5 4165.5,3762.5 4223.5,3820.5 4223.5,3884.25
  SIGNAL_2 w5: v1@3041.79,2588.82 3063.2,2602.5 ; v1(3045.24,2584.53) 3063.2,2602.5 ; v1@3045.24,2590.03 ccw(c3045.24,2603.31) 3054.63,2593.92 ccw(c3064.01,2584.53) v1@3050.74,2584.53 ; v1@3049.52,2581.09 3063.2,2602.5 ; v1@3252.54,2691.34 3258,2669 v1@3263.46,2691.34 ; v1@3254.11,2688.11 cw(c3244.72,2678.72) 3258,2678.72 cw(c3271.28,2678.72) v1@3261.89,2688.11 ; v1(3258,2692) 3258,2654.86 3205.64,2602.5 3063.2,2602.5
LDATA14: pad.PC53 U1.D14 U6.51 U10.43 | length 3405.6
  Top Layer w5: U1.D14@2998.37,2595.28 cw(c2998.37,2584.77) 3005.8,2592.2 ; U1.D14@3003.74,2600.65 ccw(c3019.18,2600.65) 3008.26,2589.74 ; v1@3008.5,2584 ccw(c2995.22,2584) 3004.61,2593.39 ccw(c3014,2602.78) v1@3014,2589.5 ; v1@3008.93,2581.87 U1.D14@3002.69,2603.85 ; v1@3009.57,2580.75 U1.D14@2998.37,2600.65 ; v1@3009.66,2580.62 U1.D14@2998.37,2599.63 ; v1@3010.45,2579.8 U1.D14@2994.91,2596.54 ; v1@3016.44,2588.93 U1.D14@2994.91,2596.54 ; v1@3017.38,2588.34 U1.D14@2998.37,2599.63 ; v1@3017.53,2588.22 U1.D14@2998.37,2600.65 ; v1@3018.42,2587.28 U1.D14@3002.69,2603.85 ; v1@3227.54,2692.66 3233,2715 v1@3238.46,2692.66 ; v1@3229.11,2695.89 ccw(c3219.72,2705.28) 3233,2705.28 ccw(c3246.28,2705.28) v1@3236.89,2695.89 ; v1(3233,2692) 3233,2742.39 3479.61,2989 U6.51@3479.61,3175.91 3479.61,3198.76 3559.18,3278.32 3626,3278.32 3655,3307.32 v1(3655,3354) ; U10.43@3408.42,3385.41 3623.59,3385.41 v1(3655,3354) ; U10.43@3427.12,3385.41 3447.05,3385.41 ; U10.43@3428.84,3383.7 cw(c3432.97,3379.57) 3432.97,3385.41 cw(c3432.97,3391.26) U10.43@3428.84,3387.13 ; U6.51@3472.35,3153.18 3479.61,3129.42 ; U6.51@3474.42,3149.07 cw(c3461.89,3136.53) 3479.61,3136.53 cw(c3497.34,3136.53) U6.51@3484.81,3149.07 ; U6.51@3474.94,3203.23 3500.23,3219.37 ; U6.51@3479.61,3154.26 3479.61,3129.42 ; U6.51@3479.61,3197.57 3500.23,3219.37 ; U6.51@3479.61,3204.91 ccw(c3479.61,3219.77) 3490.12,3209.26 ; U6.51@3485.53,3193.21 3500.23,3219.37 ; U6.51@3486.88,3153.18 3479.61,3129.42 ; U6.51@3486.96,3197.57 cw(c3507.55,3197.57) 3492.99,3212.13 ; v1@3649.5,3354 ccw(c3636.22,3354) 3645.61,3363.39 ccw(c3655,3372.78) v1@3655,3359.5 ; v1@3649.54,3353.34 3655,3331 ; v1@3650.73,3350.54 3636.39,3372.61 ; v1@3651.11,3350.11 cw(c3641.72,3340.72) 3655,3340.72 cw(c3668.28,3340.72) v1@3658.89,3350.11 ; v1@3658.46,3358.27 3636.39,3372.61 ; v1@3660.46,3353.34 3655,3331 ; U1.D14@2994.91,2596.54 v1(3014,2584) ; U1.D14@2994.91,2596.54 v1(3014,2584) ; U1.D14@2998.37,2599.63 v1(3014,2584) ; U1.D14@2998.37,2599.63 U1.D14@2998.37,2600.65 ; U1.D14@2998.37,2599.63 v1(3014,2584) ; U1.D14@2998.37,2600.65 v1(3014,2584) ; U1.D14@2998.37,2600.65 v1(3014,2584) ; U1.D14@3002.69,2603.85 v1(3014,2584) ; U1.D14@3002.69,2603.85 v1(3014,2584) ; 3636.39,3372.61 v1(3655,3354) ; 3655,3331 v1(3655,3354)
  SIGNAL_1 w5: v1@3651.54,3358.27 3673.61,3372.61 v1@3659.27,3350.54 ; v1(3655,3354) 3711.35,3410.35 3711.35,3433.35 4020.5,3742.5 4177,3742.5 4269.04,3834.54 pad.PC53@4269.04,3838.71 ; v1@3655,3359.5 ccw(c3655,3372.78) 3664.39,3363.39 ccw(c3673.78,3354) v1@3660.5,3354
  SIGNAL_2 w5: v1@3010.54,2588.27 3032.61,2602.61 v1@3018.27,2580.54 ; v1(3014,2584) 3046.5,2616.5 3205.5,2616.5 3233,2644 v1(3233,2692) 3233,2669 ; v1@3014,2589.5 ccw(c3014,2602.78) 3023.39,2593.39 ccw(c3032.78,2584) v1@3019.5,2584 ; v1@3227.54,2691.34 3233,2669 ; v1@3229.11,2688.11 cw(c3219.72,2678.72) 3233,2678.72 cw(c3246.28,2678.72) v1@3236.89,2688.11 ; v1@3238.46,2691.34 3233,2669
LDATA15: pad.PC54 U1.B17 U6.53 U10.45 | length 3899.3
  Top Layer w5: U1.B17@3057.56,2502.36 cw(c3048.04,2492.85) 3061.5,2492.85 ; U1.B17@3061.36,2506.16 3061.5,2506.02 3061.5,2482.5 v1@3068,2476 ; 3061.5,2491.57 ccw(c3084.9,2491.57) v1@3068.35,2475.02 ; 3061.5,2493.53 cw(c3073.99,2493.53) U1.B17@3065.16,2502.36 ; U1.B17@3061.5,2503.64 ccw(c3096.97,2503.64) v1@3071.89,2478.56 ; v1@3062.55,2473.93 U1.B17@3061.5,2502.34 ; v1(3068,2474.67) U1.B17@3061.5,2502.34 ; v1@3073.21,2476.44 U1.B17@3061.5,2502.34 ; v1@3206.54,2693.66 3212,2716 v1@3217.46,2693.66 ; v1@3208.11,2696.89 ccw(c3198.72,2706.28) 3212,2706.28 ccw(c3225.28,2706.28) v1@3215.89,2696.89 ; v1(3212,2693) 3212,2735.8 3416.62,2940.42 U6.53@3416.62,3175.91 3416.62,3229.12 3479.04,3291.54 3619,3291.54 3636,3308.54 ; U10.45@3408.42,3346.04 3623,3346.04 ; U6.53@3409.36,3153.18 3416.62,3129.42 ; U6.53@3409.36,3198.65 3416.62,3222.41 ; U6.53@3411.43,3149.07 cw(c3398.9,3136.53) 3416.62,3136.53 cw(c3434.35,3136.53) U6.53@3421.81,3149.07 ; U6.53@3411.43,3202.76 ccw(c3398.9,3215.29) 3416.62,3215.29 ccw(c3434.35,3215.29) U6.53@3421.81,3202.76 ; U6.53@3416.62,3154.26 3416.62,3129.42 ; U6.53@3416.62,3197.57 3416.62,3222.41 ; U6.53@3423.88,3153.18 3416.62,3129.42 ; U6.53@3423.88,3198.65 3416.62,3222.41 ; U10.45@3427.12,3346.04 3447.05,3346.04 ; U10.45@3428.84,3344.33 cw(c3432.97,3340.2) 3432.97,3346.04 cw(c3432.97,3351.89) U10.45@3428.84,3347.75 ; 3629.11,3339.94 cw(c3613.67,3324.5) v1@3635.5,3324.5 ; v1@3630.58,3323.55 3636,3308.54 ; v1@3631.01,3322.19 3623,3346.04 ; v1@3632.11,3320.61 cw(c3622.72,3311.22) 3636,3311.22 cw(c3649.28,3311.22) v1@3639.89,3320.61 ; v1@3640.37,3327.84 3623,3346.04 ; v1@3641.42,3323.55 3636,3308.54 ; 3623,3346.04 3636,3333.04 v1(3636,3324.5) ; 3623,3346.04 v1(3636,3324.5) ; 3636,3308.54 v1(3636,3324.5) ; 3636,3308.54 v1(3636,3324.5)
  SIGNAL_1 w5: v1@3630.54,3325.16 3636,3347.5 v1@3641.46,3325.16 ; v1@3632.11,3328.39 ccw(c3622.72,3337.78) 3636,3337.78 ccw(c3649.28,3337.78) v1@3639.89,3328.39 ; v1(3636,3324.5) 3636,3359.5 3701.35,3424.85 3701.35,3442.85 4011,3752.5 4169.64,3752.5 4234,3816.86 4234,3882.41 ; pad.PC54@4247.92,3917.02 cw(c4200.37,3916.04) 4234,3882.41 ; pad.PC54@4251.21,3928.77 4234.81,3883.22 ; pad.PC54@4252.92,3917.12 cw(c4216.63,3916.37) 4242.3,3890.7 cw(c4267.97,3865.03) pad.PC54@4268.71,3901.33 ; pad.PC54@4255.9,3926.79 4234.81,3883.22 ; pad.PC54@4257.92,3917.22 cw(c4232.88,3916.71) 4250.59,3899 cw(c4268.3,3881.29) pad.PC54@4268.81,3906.33 ; pad.PC54@4260.32,3924.36 4234.81,3883.22 ; pad.PC54@4264.45,3921.49 4234.81,3883.22 ; pad.PC54@4268.61,3896.33 ccw(c4267.63,3848.78) 4234,3882.41 ; pad.PC54@4269.04,3917.45 4234,3882.41 ; pad.PC54@4273.09,3912.85 4234.81,3883.22 ; pad.PC54@4275.95,3908.73 4234.81,3883.22 ; pad.PC54@4278.38,3904.31 4234.81,3883.22 ; pad.PC54@4280.36,3899.61 4234.81,3883.22
  SIGNAL_2 w5: v1(3068,2474.67) 3135.17,2474.67 3300,2639.5 3300,2693.92 3283.92,2710 3229.08,2710 3212.08,2693 v1(3212,2693) ; v1@3068.66,2469.21 3091,2474.67 v1@3068.66,2480.13 ; v1@3071.89,2470.78 cw(c3081.28,2461.39) 3081.28,2474.67 cw(c3081.28,2487.95) v1@3071.89,2478.56 ; v1@3212,2698.5 ccw(c3212,2711.97) 3221.53,2702.45 ; v1@3217.5,2693 cw(c3230.59,2693) 3221.33,2702.25
LDATA16: U1.C16 U7.2 | length 1069.7
  Top Layer w5: U1.C16@3030.23,2537.6 ccw(c3045.75,2535.04) 3034.63,2523.92 ; U1.C16@3035.16,2536.79 ccw(c3057.57,2533.09) 3041.51,2517.04 ; v1@3042.11,2490.89 ccw(c3032.76,2500.24) 3045.98,2500.24 ; v1(3046,2487) 3045.98,2512.53 3029.86,2528.69 ; 3045.98,2500.32 ccw(c3059.32,2500.32) v1@3049.89,2490.89 ; v1(3228,2270) 3375.62,2270 3416.62,2229 U7.2@3416.62,2179.73 ; v1@3228.66,2264.54 3251,2270 v1@3228.66,2275.46 ; v1@3231.89,2266.11 cw(c3241.28,2256.72) 3241.28,2270 cw(c3241.28,2283.28) v1@3231.89,2273.89 ; U7.2@3409.36,2202.47 3416.62,2226.23 ; U7.2@3411.43,2206.58 ccw(c3398.9,2219.11) 3416.62,2219.11 ccw(c3434.35,2219.11) U7.2@3421.81,2206.58 ; U7.2@3416.62,2201.39 3416.62,2226.23 ; U7.2@3423.88,2202.47 3416.62,2226.23 ; 3029.86,2528.69 ccw(c3025.06,2528.69) 3027.33,2532.92 cw(c3025.06,2528.69) 3029.86,2528.69 ; 3029.86,2528.69 cw(c3034.67,2528.69) 3032.4,2532.92 ccw(c3034.67,2528.69) 3029.86,2528.69 ; 3029.86,2528.69 U1.C16@3029.86,2537.66 ; 3029.86,2528.69 3034.99,2536.05 3029.86,2528.69 ; 3029.86,2528.69 3024.73,2536.05 3029.86,2528.69 ; 3029.86,2528.69 U1.C16@3029.86,2537.66 ; 3029.86,2528.69 U1.C16@3029.86,2537.66
  SIGNAL_1 w5: v1@3040.54,2486.34 3046,2464 ; v1@3042.11,2483.11 cw(c3032.72,2473.72) 3046,2473.72 cw(c3059.28,2473.72) v1@3049.89,2483.11 ; v1@3051.46,2486.34 3046,2464 ; v1@3222.5,2270 ccw(c3209.22,2270) 3218.61,2279.39 ccw(c3228,2288.78) v1@3228,2275.5 ; v1@3223.73,2266.54 3209.39,2288.61 v1@3231.46,2274.27 ; v1(3228,2270) 3155.24,2342.76 3154.24,2342.76 3046,2451 v1(3046,2487) 3046,2464
LDATA17: U1.E15 U7.4 | length 1356.6
  Top Layer w5: U1.E15@2966.87,2563.78 cw(c2966.87,2550.81) 2976.04,2559.98 cw(c2985.22,2569.16) U1.E15@2972.24,2569.16 ; U1.E15@2972.24,2563.79 cw(c2961.95,2553.5) v1@2976.5,2553.5 ; 2973.51,2562.52 ccw(c2982,2571) v1@2982,2559 ; v1@2976.92,2551.38 U1.E15@2971.12,2572.45 ; v1@2977.59,2550.21 U1.E15@2966.87,2569.16 ; v1@2978.53,2549.23 U1.E15@2963.58,2564.91 ; v1@2984.28,2558.51 U1.E15@2963.58,2564.91 ; v1@2985.44,2557.79 U1.E15@2966.87,2569.16 ; v1@2986.39,2556.82 U1.E15@2971.12,2572.45 ; v1@3186.3,2291.49 3209.16,2287.5 ; v1@3187,2280.59 3209.16,2287.5 ; v1@3189.89,2282.11 cw(c3202.9,2269.1) 3202.9,2287.5 ; v1@3189.89,2289.89 ccw(c3195.66,2295.66) 3195.66,2287.5 ; U7.4@3472.35,2202.47 3479.61,2226.23 ; U7.4@3474.42,2206.58 ccw(c3461.89,2219.11) 3479.61,2219.11 ccw(c3497.34,2219.11) U7.4@3484.81,2206.58 ; U7.4@3479.61,2179.73 3479.61,2262.63 3454.75,2287.5 3187.5,2287.5 v1(3186,2286) 3209.16,2287.5 ; U7.4@3479.61,2201.39 3479.61,2226.23 ; U7.4@3486.88,2202.47 3479.61,2226.23 ; U1.E15@2963.58,2564.91 v1@2982,2554.03 ; U1.E15@2963.58,2564.91 v1(2982,2553.5) ; U1.E15@2966.87,2569.16 v1@2982,2554.03 ; U1.E15@2966.87,2569.16 v1(2982,2553.5) ; U1.E15@2971.12,2572.45 v1@2982,2554.03 ; U1.E15@2971.12,2572.45 v1(2982,2553.5)
  SIGNAL_2 w5: v1@2976.54,2552.84 2982,2530.5 v1@2987.46,2552.84 ; v1@2978.11,2549.61 cw(c2968.72,2540.22) 2982,2540.22 cw(c2995.28,2540.22) v1@2985.89,2549.61 ; v1(2982,2553.5) 2982,2507.63 3186,2303.63 ; v1@3180.57,2286.86 3186,2303.63 ; v1@3182.11,2289.89 ccw(c3172.72,2299.28) 3186,2299.28 ccw(c3199.28,2299.28) v1@3189.89,2289.89 ; v1(3186,2286) 3186,2303.63 ; v1@3191.43,2286.86 3186,2303.63
LDATA18: U1.E14 U7.5 | length 1366.8
  Top Layer w5: U1.E14@2966.87,2595.28 cw(c2966.87,2582.31) 2976.04,2591.48 cw(c2985.22,2600.65) U1.E14@2972.24,2600.65 ; v1@2977.02,2585 ccw(c2963.75,2585) 2973.13,2594.39 ccw(c2982.52,2603.78) v1@2982.52,2590.5 ; v1@2977.5,2582.77 U1.E14@2971.1,2603.96 ; v1@2978.18,2581.62 U1.E14@2966.87,2600.65 ; v1@2979.12,2580.68 U1.E14@2963.56,2596.42 ; v1@2984.75,2590.03 U1.E14@2963.56,2596.42 ; v1@2985.9,2589.34 U1.E14@2966.87,2600.65 ; v1@2986.85,2588.4 U1.E14@2971.1,2603.96 ; v1(3142.5,2301.5) 3454.89,2301.5 3511.11,2245.28 U7.5@3511.11,2179.73 ; v1@3146.39,2297.61 cw(c3155.78,2288.22) 3155.78,2301.5 cw(c3155.78,2314.78) v1@3146.39,2305.39 ; U7.5@3503.85,2202.47 3511.11,2226.23 ; U7.5@3505.92,2206.58 ccw(c3493.38,2219.11) 3511.11,2219.11 ccw(c3528.84,2219.11) U7.5@3516.3,2206.58 ; U7.5@3511.11,2201.39 3511.11,2226.23 ; U7.5@3518.37,2202.47 3511.11,2226.23 ; U1.E14@2963.56,2596.42 v1(2982.52,2585) ; U1.E14@2963.56,2596.42 v1(2982.52,2585) ; U1.E14@2966.87,2600.65 v1(2982.52,2585) ; U1.E14@2966.87,2600.65 v1(2982.52,2585) ; U1.E14@2971.1,2603.96 v1(2982.52,2585) ; U1.E14@2971.1,2603.96 v1(2982.52,2585)
  SIGNAL_1 w5: v1@2979.17,2580.64 2997.5,2570.02 ; v1@2982.52,2579.5 cw(c2982.52,2566.22) 2991.91,2575.61 cw(c3001.3,2585) v1@2988.02,2585 ; v1(2982.52,2585) 2997.5,2570.02 ; v1@2986.89,2588.35 2997.5,2570.02 ; 2996.5,2526.22 2996.5,2473.5 3142.5,2327.5 v1(3142.5,2301.5) ; 2997.5,2527.22 2997.5,2570.02 ; v1@3137.04,2302.16 3142.5,2324.5 v1@3147.96,2302.16 ; v1@3138.61,2305.39 ccw(c3129.22,2314.78) 3142.5,2314.78 ccw(c3155.78,2314.78) v1@3146.39,2305.39
LDATA19: U1.E13 U7.7 | length 1558.7
  Top Layer w5: U1.E13@2966.87,2626.78 cw(c2966.87,2613.8) 2976.04,2622.98 cw(c2985.22,2632.15) U1.E13@2972.24,2632.15 ; v1@2977.5,2616.02 ccw(c2964.22,2616.02) 2973.61,2625.41 ccw(c2983,2634.8) v1@2983,2621.52 ; v1@2978,2613.74 U1.E13@2971.09,2635.48 ; v1@2978.67,2612.63 U1.E13@2966.87,2632.15 ; v1@2979.58,2611.71 U1.E13@2963.54,2627.93 ; v1@2985.28,2621.02 U1.E13@2963.54,2627.93 ; v1@2986.39,2620.35 U1.E13@2966.87,2632.15 ; v1@2987.31,2619.44 U1.E13@2971.09,2635.48 ; v1(3111,2326) 3148,2326 3162.5,2311.5 3522.5,2311.5 3536.46,2297.54 3543.53,2290.47 3550.6,2283.4 3574.1,2259.9 U7.7@3574.1,2179.73 ; v1@3111.66,2320.54 3134,2326 v1@3111.66,2331.46 ; v1@3114.89,2322.11 cw(c3124.28,2312.72) 3124.28,2326 cw(c3124.28,2339.28) v1@3114.89,2329.89 ; U7.7@3566.84,2202.47 3574.1,2226.23 ; U7.7@3568.91,2206.58 ccw(c3556.38,2219.11) 3574.1,2219.11 ccw(c3591.83,2219.11) U7.7@3579.29,2206.58 ; U7.7@3574.1,2201.39 3574.1,2226.23 ; U7.7@3581.36,2202.47 3574.1,2226.23 ; U1.E13@2963.54,2627.93 v1(2983,2616.02) ; U1.E13@2963.54,2627.93 v1(2983,2616.02) ; U1.E13@2966.87,2632.15 v1(2983,2616.02) ; U1.E13@2966.87,2632.15 v1(2983,2616.02) ; U1.E13@2971.09,2635.48 v1(2983,2616.02) ; U1.E13@2971.09,2635.48 v1(2983,2616.02)
  SIGNAL_1 w5: 2966.5,2600.02 2966.5,2489.36 3111,2344.86 ; v1@2977.5,2616.02 cw(c2964.22,2616.02) 2973.61,2606.63 cw(c2983,2597.24) v1@2983,2610.52 ; v1@2978.67,2619.41 2967,2600.02 ; v1@2986.39,2611.69 2967,2600.02 ; v1@3105.56,2326.8 3111,2344.86 ; v1@3107.11,2329.89 ccw(c3097.72,2339.28) 3111,2339.28 ccw(c3124.28,2339.28) v1@3114.89,2329.89 ; v1(3111,2326) 3111,2344.86 ; v1@3116.44,2326.8 3111,2344.86 ; 2967,2600.02 v1(2983,2616.02) 2967,2600.02
LDATA20: U1.E12 U7.8 | length 1545.8
  Top Layer w5: U1.E12@2966.87,2658.27 cw(c2966.87,2645.3) 2976.04,2654.47 cw(c2985.22,2663.65) U1.E12@2972.24,2663.65 ; v1@2976.5,2648.52 ccw(c2963.22,2648.52) 2972.61,2657.91 ccw(c2982,2667.29) v1@2982,2654.02 ; v1@2976.94,2646.35 U1.E12@2971.12,2666.94 ; v1@2977.64,2645.16 U1.E12@2966.87,2663.65 ; v1@2978.62,2644.18 U1.E12@2963.58,2659.4 ; v1@2984.17,2653.57 U1.E12@2963.58,2659.4 ; v1@2985.36,2652.87 U1.E12@2966.87,2663.65 ; v1@2986.34,2651.9 U1.E12@2971.12,2666.94 ; v1(3196,2327) 3535,2327 3605.6,2256.4 U7.8@3605.6,2179.73 ; v1@3196.66,2321.54 3219,2327 v1@3196.66,2332.46 ; v1@3199.89,2323.11 cw(c3209.28,2313.72) 3209.28,2327 cw(c3209.28,2340.28) v1@3199.89,2330.89 ; U7.8@3598.34,2202.47 3605.6,2226.23 ; U7.8@3600.41,2206.58 ccw(c3587.87,2219.11) 3605.6,2219.11 ccw(c3623.32,2219.11) U7.8@3610.79,2206.58 ; U7.8@3605.6,2201.39 3605.6,2226.23 ; U7.8@3612.86,2202.47 3605.6,2226.23 ; U1.E12@2963.58,2659.4 v1(2982,2648.52) ; U1.E12@2963.58,2659.4 v1(2982,2648.52) ; U1.E12@2966.87,2663.65 v1(2982,2648.52) ; U1.E12@2966.87,2663.65 v1(2982,2648.52) ; U1.E12@2971.12,2666.94 v1(2982,2648.52) ; U1.E12@2971.12,2666.94 v1(2982,2648.52)
  SIGNAL_2 w5: v1@2978.6,2644.2 2998.5,2632.02 ; v1@2982,2643.02 cw(c2982,2629.74) 2991.39,2639.13 cw(c3000.78,2648.52) v1@2987.5,2648.52 ; v1(2982,2648.52) 2998.5,2632.02 ; v1@2986.32,2651.92 2998.5,2632.02 ; v1@3192.11,2323.11 ccw(c3182.72,2313.72) 3182.72,2327 ccw(c3182.72,2340.28) v1@3192.11,2330.89 ; v1@3195.16,2321.56 3178,2327 ; v1@3195.16,2332.44 3178,2327 ; 2998.5,2632.02 2998.5,2506.5 3178,2327 ; 3178,2327 v1(3196,2327) 3178,2327
LDATA21: U1.E16 U7.10 | length 1674.5
  Top Layer w5: v1@2946.7,2525.43 U1.E16@2962.64,2540.97 ; v1@2948.79,2527.04 U1.E16@2970.18,2533.43 ; v1@2951,2527.5 ccw(c2951,2541.29) 2960.75,2531.54 ; v1@2954.38,2517.66 U1.E16@2970.18,2533.43 ; v1@2956.01,2519.73 U1.E16@2962.64,2540.97 ; v1@2956.5,2522 cw(c2969.27,2522) 2960.24,2531.03 ; U1.E16@2961.5,2537.66 cw(c2948.52,2537.66) 2957.7,2528.49 cw(c2966.87,2519.31) U1.E16@2966.87,2532.29 ; v1@3070.54,2326.27 3092.61,2340.61 v1@3078.27,2318.54 ; v1(3074,2322) 3094.5,2342.5 3587.5,2342.5 3668.59,2261.41 U7.10@3668.59,2179.73 ; v1@3074,2327.5 ccw(c3074,2340.78) 3083.39,2331.39 ccw(c3092.78,2322) v1@3079.5,2322 ; U7.10@3661.33,2202.47 3668.59,2226.23 ; U7.10@3663.4,2206.58 ccw(c3650.86,2219.11) 3668.59,2219.11 ccw(c3686.32,2219.11) U7.10@3673.78,2206.58 ; U7.10@3668.59,2201.39 3668.59,2226.23 ; U7.10@3675.85,2202.47 3668.59,2226.23 ; v1(2951,2522) v1@2951.21,2522 ; v1(2951,2522) U1.E16@2966.87,2537.66 ; v1(2951,2522) U1.E16@2970.18,2533.43 ; v1(2951,2522) U1.E16@2962.64,2540.97 ; v1(2951,2522) U1.E16@2966.87,2537.66 ; v1@2951.21,2522 U1.E16@2966.87,2537.66 ; v1@2951.21,2522 U1.E16@2970.18,2533.43 ; v1@2951.21,2522 U1.E16@2962.64,2540.97 ; v1@2951.21,2522 U1.E16@2966.87,2537.66 ; U1.E16@2966.87,2537.66 2947.65,2526.36 U1.E16@2966.87,2537.66 ; U1.E16@2966.87,2537.66 2955.32,2518.59 U1.E16@2966.87,2537.66
  SIGNAL_2 w5: v1@2947.63,2517.66 2966.59,2506.41 ; v1@2951,2516.5 cw(c2951,2503.22) 2960.39,2512.61 cw(c2969.78,2522) v1@2956.5,2522 ; v1(2951,2522) 2966.59,2506.41 ; v1@2955.34,2525.37 2966.59,2506.41 ; v1@3068.54,2322.66 3074,2345 v1@3079.46,2322.66 ; v1@3070.11,2325.89 ccw(c3060.72,2335.28) 3074,2335.28 ccw(c3087.28,2335.28) v1@3077.89,2325.89 ; v1(3074,2322) 3074,2399 2966.59,2506.41
LDATA22: U1.F15 U7.11 | length 1681.1
  Top Layer w5: U1.F15@2935.37,2568.63 U1.F15@2935.37,2569.16 ; U1.F15@2935.37,2574.53 ccw(c2935.37,2587.51) 2944.55,2578.33 ccw(c2953.72,2569.16) U1.F15@2940.75,2569.16 ; v1@2945.25,2584.53 cw(c2931.97,2584.53) 2941.36,2575.14 cw(c2950.75,2565.75) v1@2950.75,2579.03 ; v1@2945.71,2586.73 U1.F15@2939.61,2565.86 ; v1@2946.4,2587.9 U1.F15@2935.37,2569.16 ; v1@2947.36,2588.86 U1.F15@2932.07,2573.4 ; v1@2952.94,2579.49 U1.F15@2932.07,2573.4 ; v1@2954.11,2580.18 U1.F15@2935.37,2569.16 ; v1@2955.08,2581.14 U1.F15@2939.61,2565.86 ; v1@3046.54,2333.27 3068.61,2347.61 v1@3054.27,2325.54 ; v1(3050,2329) 3073.5,2352.5 3617.5,2352.5 3700.09,2269.91 U7.11@3700.09,2179.73 ; v1@3050,2334.5 ccw(c3050,2347.78) 3059.39,2338.39 ccw(c3068.78,2329) v1@3055.5,2329 ; U7.11@3692.83,2202.47 3700.09,2226.23 ; U7.11@3694.9,2206.58 ccw(c3682.36,2219.11) 3700.09,2219.11 ccw(c3717.81,2219.11) U7.11@3705.28,2206.58 ; U7.11@3700.09,2201.39 3700.09,2226.23 ; U7.11@3707.35,2202.47 3700.09,2226.23 ; U1.F15@2932.07,2573.4 v1(2950.75,2584.53) ; U1.F15@2932.07,2573.4 v1(2950.75,2584.53) ; U1.F15@2935.37,2569.16 v1(2950.75,2584.53) ; U1.F15@2935.37,2569.16 v1(2950.75,2584.53) ; U1.F15@2939.61,2565.86 v1(2950.75,2584.53) ; U1.F15@2939.61,2565.86 v1(2950.75,2584.53)
  SIGNAL_2 w5: v1@2945.25,2584.53 cw(c2931.97,2584.53) 2941.36,2575.14 cw(c2950.75,2565.75) v1@2950.75,2579.03 ; v1@2946.4,2587.9 2935.21,2569 ; v1@2954.12,2580.19 2935.21,2569 ; v1@3046.11,2332.89 ccw(c3033.1,2345.9) 3051.5,2345.9 ; v1(3050,2329) 3051.5,2330.5 3051.5,2398.88 2935.21,2515.16 2935.21,2569 ; 3051.5,2338.66 ccw(c3059.66,2338.66) v1@3053.89,2332.89 ; 2935.21,2569 v1(2950.75,2584.53) 2935.21,2569
LDATA23: U1.G13 U7.13 | length 1750
  Top Layer w5: U1.G13@2903.88,2626.78 cw(c2903.88,2613.8) 2913.05,2622.98 cw(c2922.23,2632.15) U1.G13@2909.25,2632.15 ; v1@2914.5,2616.03 ccw(c2901.22,2616.03) 2910.61,2625.42 ccw(c2920,2634.81) v1@2920,2621.53 ; v1@2915,2613.74 U1.G13@2908.1,2635.48 ; v1@2915.67,2612.64 U1.G13@2903.88,2632.15 ; v1@2916.58,2611.72 U1.G13@2900.55,2627.93 ; v1@2922.28,2621.03 U1.G13@2900.55,2627.93 ; v1@2923.39,2620.36 U1.G13@2903.88,2632.15 ; v1@2924.31,2619.44 U1.G13@2908.1,2635.48 ; v1@3036.5,2351 3048,2362.5 3675.58,2362.5 3763.08,2275 U7.13@3763.08,2179.73 ; U7.13@3755.82,2202.47 3763.08,2226.23 ; U7.13@3757.89,2206.58 ccw(c3745.35,2219.11) 3763.08,2219.11 ccw(c3780.81,2219.11) U7.13@3768.27,2206.58 ; U7.13@3763.08,2201.39 3763.08,2226.23 ; U7.13@3770.34,2202.47 3763.08,2226.23 ; U1.G13@2900.55,2627.93 v1(2920,2616.03) ; U1.G13@2900.55,2627.93 v1(2920,2616.03) ; U1.G13@2903.88,2632.15 v1(2920,2616.03) ; U1.G13@2903.88,2632.15 v1(2920,2616.03) ; U1.G13@2908.1,2635.48 v1(2920,2616.03) ; U1.G13@2908.1,2635.48 v1(2920,2616.03)
  SIGNAL_2 w5: v1@2914.54,2615.4 2919.87,2593.03 ; v1@2916.11,2612.14 cw(c2907.03,2603.05) 2919.87,2603.05 ; 2919.87,2602.45 cw(c2933.58,2602.45) v1@2923.89,2612.14 ; v1@2925.46,2615.34 2919.87,2593.03 ; v1@3030.54,2351.66 3036,2374 v1@3041.46,2351.66 ; v1@3032.11,2354.89 ccw(c3022.72,2364.28) 3036,2364.28 ccw(c3049.28,2364.28) v1@3039.89,2354.89 ; v1(3036,2351) 3036,2400.23 2919.87,2516.36 2919.87,2615.9 v1(2920,2616.03) 2919.87,2593.03
LDATA24: U1.E17 U7.42 | length 1417.3
  Top Layer w5: U1.E17@2961.6,2505.14 2966.87,2492.13 ; U1.E17@2963.07,2502.36 cw(c2953.9,2493.19) 2966.87,2493.19 cw(c2979.84,2493.19) U1.E17@2970.67,2502.36 ; U1.E17@2972.14,2505.14 2966.87,2492.13 ; 3393.06,2459.17 ccw(c3393.06,2488.94) v1@3414.11,2467.89 ; 3405.13,2459.17 ccw(c3405.13,2476.87) v1@3417.65,2464.35 ; v1@3416.39,2469.26 3392.8,2459.17 ; v1@3418.45,2458.52 3392.8,2459.17 ; v1(3627,2464) 3668,2464 3763.08,2559.08 U7.42@3763.08,2630.91 ; v1@3627.66,2458.54 3650,2464 v1@3627.66,2469.46 ; v1@3630.89,2460.11 cw(c3640.28,2450.72) 3640.28,2464 cw(c3640.28,2477.28) v1@3630.89,2467.89 ; U7.42@3755.82,2608.18 3763.08,2584.42 ; U7.42@3757.89,2604.07 cw(c3745.35,2591.53) 3763.08,2591.53 cw(c3780.81,2591.53) U7.42@3768.27,2604.07 ; U7.42@3763.08,2609.26 3763.08,2584.42 ; U7.42@3770.34,2608.18 3763.08,2584.42 ; 2966.87,2492.13 U1.E17@2966.87,2506.16 2966.87,2492.13 ; 2966.87,2492.13 2999.83,2459.17 3414,2459.17 3418,2463.17 v1(3418,2464) 3392.8,2459.17
  SIGNAL_1 w5: v1(3418,2464) v1(3627,2464) ; v1@3418.66,2458.54 3441,2464 v1@3418.66,2469.46 ; v1@3421.89,2460.11 cw(c3431.28,2450.72) 3431.28,2464 cw(c3431.28,2477.28) v1@3421.89,2467.89 ; v1@3623.11,2460.11 ccw(c3613.72,2450.72) 3613.72,2464 ccw(c3613.72,2477.28) v1@3623.11,2467.89 ; v1@3626.34,2458.54 3604,2464 v1@3626.34,2469.46
LDATA25: U1.G12 U7.44 | length 1939
  Top Layer w5: U1.G12@2903.88,2669.02 ccw(c2903.88,2681.43) 2912.66,2672.66 ; U1.G12@2909.25,2663.65 cw(c2922.79,2663.65) 2913.22,2673.22 ; v1@2914.5,2680 cw(c2901.22,2680) 2910.61,2670.61 cw(c2920,2661.22) v1@2920,2674.5 ; v1@2914.99,2682.26 U1.G12@2908.12,2660.35 ; v1@2915.65,2683.36 U1.G12@2903.88,2663.65 ; v1@2915.67,2683.39 U1.G12@2903.88,2663.88 ; v1@2916.55,2684.28 U1.G12@2900.52,2667.84 ; v1@2922.33,2675.02 U1.G12@2900.52,2667.84 ; v1@2923.39,2675.67 U1.G12@2903.88,2663.88 ; v1@2923.43,2675.7 U1.G12@2903.88,2663.65 ; v1@2924.33,2676.61 U1.G12@2908.12,2660.35 ; v1(3001.5,2389.5) 3506.5,2389.5 3700.09,2583.09 U7.44@3700.09,2630.91 ; v1@3002.16,2384.04 3024.5,2389.5 v1@3002.16,2394.96 ; v1@3005.39,2385.61 cw(c3014.78,2376.22) 3014.78,2389.5 cw(c3014.78,2402.78) v1@3005.39,2393.39 ; U7.44@3692.83,2608.18 3700.09,2584.42 ; U7.44@3694.9,2604.07 cw(c3682.36,2591.53) 3700.09,2591.53 cw(c3717.81,2591.53) U7.44@3705.28,2604.07 ; U7.44@3700.09,2609.26 3700.09,2584.42 ; U7.44@3707.35,2608.18 3700.09,2584.42 ; U1.G12@2900.52,2667.84 v1(2920,2680) ; U1.G12@2900.52,2667.84 v1(2920,2680) ; U1.G12@2903.88,2663.65 U1.G12@2903.88,2663.88 ; U1.G12@2903.88,2663.65 v1(2920,2680) ; U1.G12@2903.88,2663.65 v1(2920,2680) ; U1.G12@2903.88,2663.88 v1(2920,2680) ; U1.G12@2903.88,2663.88 v1(2920,2680) ; U1.G12@2908.12,2660.35 v1(2920,2680) ; U1.G12@2908.12,2660.35 v1(2920,2680)
  SIGNAL_1 w5: v1@2914.5,2680 cw(c2901.22,2680) 2910.61,2670.61 cw(c2920,2661.22) v1@2920,2674.5 ; v1@2915.67,2683.4 2903.75,2663.75 ; v1@2923.4,2675.67 2903.75,2663.75 ; 2987.01,2389 ccw(c2987.01,2403.98) v1@2997.61,2393.39 ; 2989.43,2389 cw(c2989.43,2377.43) v1@2997.61,2385.61 ; v1@3000.72,2394.94 2978.49,2389 ; v1@3000.96,2384.03 2978.49,2389 ; 2903.75,2663.75 v1(2920,2680) 2903.75,2663.75 ; 2903.75,2663.75 2903.75,2632.27 2904.5,2631.52 2904.5,2600.53 2904,2600.03 2904,2458.5 2973.5,2389 3001,2389 v1(3001.5,2389.5) 2978.49,2389
LDATA26: U1.F14 U7.45 | length 1679.3
  Top Layer w5: U1.F14@2935.37,2606.03 ccw(c2935.37,2620.81) 2945.82,2610.36 ; U1.F14@2940.75,2600.65 cw(c2951.92,2600.65) 2944.02,2608.55 ; 2941.77,2606.3 cw(c2951.97,2596.1) v1@2951.97,2610.53 ; 2942.92,2607.45 ccw(c2934.34,2616.03) v1@2946.47,2616.03 ; v1@2947.05,2618.48 U1.F14@2939.52,2597.24 ; v1@2947.68,2619.47 U1.F14@2936.12,2600.65 ; v1@2947.77,2619.58 U1.F14@2935.37,2600.65 ; v1@2948.73,2620.47 U1.F14@2932.16,2604.96 ; v1@2954.05,2610.94 U1.F14@2932.16,2604.96 ; v1@2955.19,2611.57 U1.F14@2935.37,2600.65 ; v1@2955.28,2611.63 U1.F14@2936.12,2600.65 ; v1@2956.15,2612.45 U1.F14@2939.52,2597.24 ; v1(2981,2410) 3503,2410 3668.59,2575.59 U7.45@3668.59,2630.91 ; v1@2981.66,2404.54 3004,2410 v1@2981.66,2415.46 ; v1@2984.89,2406.11 cw(c2994.28,2396.72) 2994.28,2410 cw(c2994.28,2423.28) v1@2984.89,2413.89 ; U7.45@3661.33,2608.18 3668.59,2584.42 ; U7.45@3663.4,2604.07 cw(c3650.86,2591.53) 3668.59,2591.53 cw(c3686.32,2591.53) U7.45@3673.78,2604.07 ; U7.45@3668.59,2609.26 3668.59,2584.42 ; U7.45@3675.85,2608.18 3668.59,2584.42 ; U1.F14@2932.16,2604.96 v1@2951.5,2616.03 ; U1.F14@2932.16,2604.96 v1(2951.97,2616.03) ; U1.F14@2935.37,2600.65 v1@2951.5,2616.03 ; U1.F14@2935.37,2600.65 v1(2951.97,2616.03) ; U1.F14@2936.12,2600.65 v1@2951.5,2616.03 ; U1.F14@2936.12,2600.65 v1(2951.97,2616.03) ; U1.F14@2939.52,2597.24 v1@2951.5,2616.03 ; U1.F14@2939.52,2597.24 v1(2951.97,2616.03)
  SIGNAL_1 w5: v1(2951.97,2616.03) 2951.97,2611.94 2935,2594.97 2935,2506.72 2981,2460.72 v1(2981,2410) ; v1@2975.54,2410.66 2981,2433 v1@2986.46,2410.66 ; v1@2977.11,2413.89 ccw(c2967.72,2423.28) 2981,2423.28 ccw(c2994.28,2423.28) v1@2984.89,2413.89
LDATA27: U1.F12 U7.47 | length 1630.5
  Top Layer w5: v1@2914.94,2650.94 U1.F12@2931.15,2666.97 ; v1@2916.97,2652.53 U1.F12@2938.7,2659.42 ; v1@2919.25,2653.02 ccw(c2919.25,2666.3) 2928.64,2656.91 ccw(c2938.03,2647.52) v1@2924.75,2647.52 ; v1@2922.67,2643.21 U1.F12@2938.7,2659.42 ; v1@2924.26,2645.24 U1.F12@2931.15,2666.97 ; U1.F12@2930,2663.65 cw(c2917.03,2663.65) 2926.2,2654.47 cw(c2935.37,2645.3) U1.F12@2935.37,2658.27 ; U1.F12@2933.65,2663.65 U1.F12@2935.37,2663.65 ; v1(2959.92,2424.5) 2960.92,2425.5 3471.5,2425.5 3605.6,2559.6 U7.47@3605.6,2630.91 ; v1@2963.81,2420.61 cw(c2975.61,2408.81) 2975.61,2425.5 ; v1@2963.81,2428.39 ccw(c2970.78,2435.36) 2970.78,2425.5 ; U7.47@3598.34,2608.18 3605.6,2584.42 ; U7.47@3600.41,2604.07 cw(c3587.87,2591.53) 3605.6,2591.53 cw(c3623.32,2591.53) U7.47@3610.79,2604.07 ; U7.47@3605.6,2609.26 3605.6,2584.42 ; U7.47@3612.86,2608.18 3605.6,2584.42 ; v1(2919.25,2647.52) U1.F12@2935.37,2663.65 ; v1(2919.25,2647.52) U1.F12@2938.7,2659.42 ; v1(2919.25,2647.52) U1.F12@2931.15,2666.97 ; v1(2919.25,2647.52) U1.F12@2935.37,2663.65 ; U1.F12@2935.37,2663.65 2915.86,2651.85 U1.F12@2935.37,2663.65 ; U1.F12@2935.37,2663.65 2923.58,2644.13 U1.F12@2935.37,2663.65
  SIGNAL_1 w5: v1@2915.86,2643.2 2935.5,2631.28 ; v1@2919.25,2642.02 cw(c2919.25,2628.75) 2928.64,2638.13 cw(c2938.03,2647.52) v1@2924.75,2647.52 ; v1(2919.25,2647.52) 2935.5,2631.28 ; v1@2923.58,2650.92 2935.5,2631.28 ; 2946.11,2435.72 ccw(c2959.92,2449.54) v1@2959.92,2430 ; 2952.36,2429.46 cw(c2947.4,2424.5) v1@2954.42,2424.5 ; v1@2955.9,2420.75 2940.19,2441.63 ; v1@2957.33,2424.5 2919.87,2461.95 2919.87,2593.98 2935.5,2609.61 2935.5,2631.28 ; v1(2959.92,2424.5) 2940.19,2441.63 ; v1@2963.07,2429.01 2940.19,2441.63